# EAGLE board mother_v1 (EAGLE 5.06)
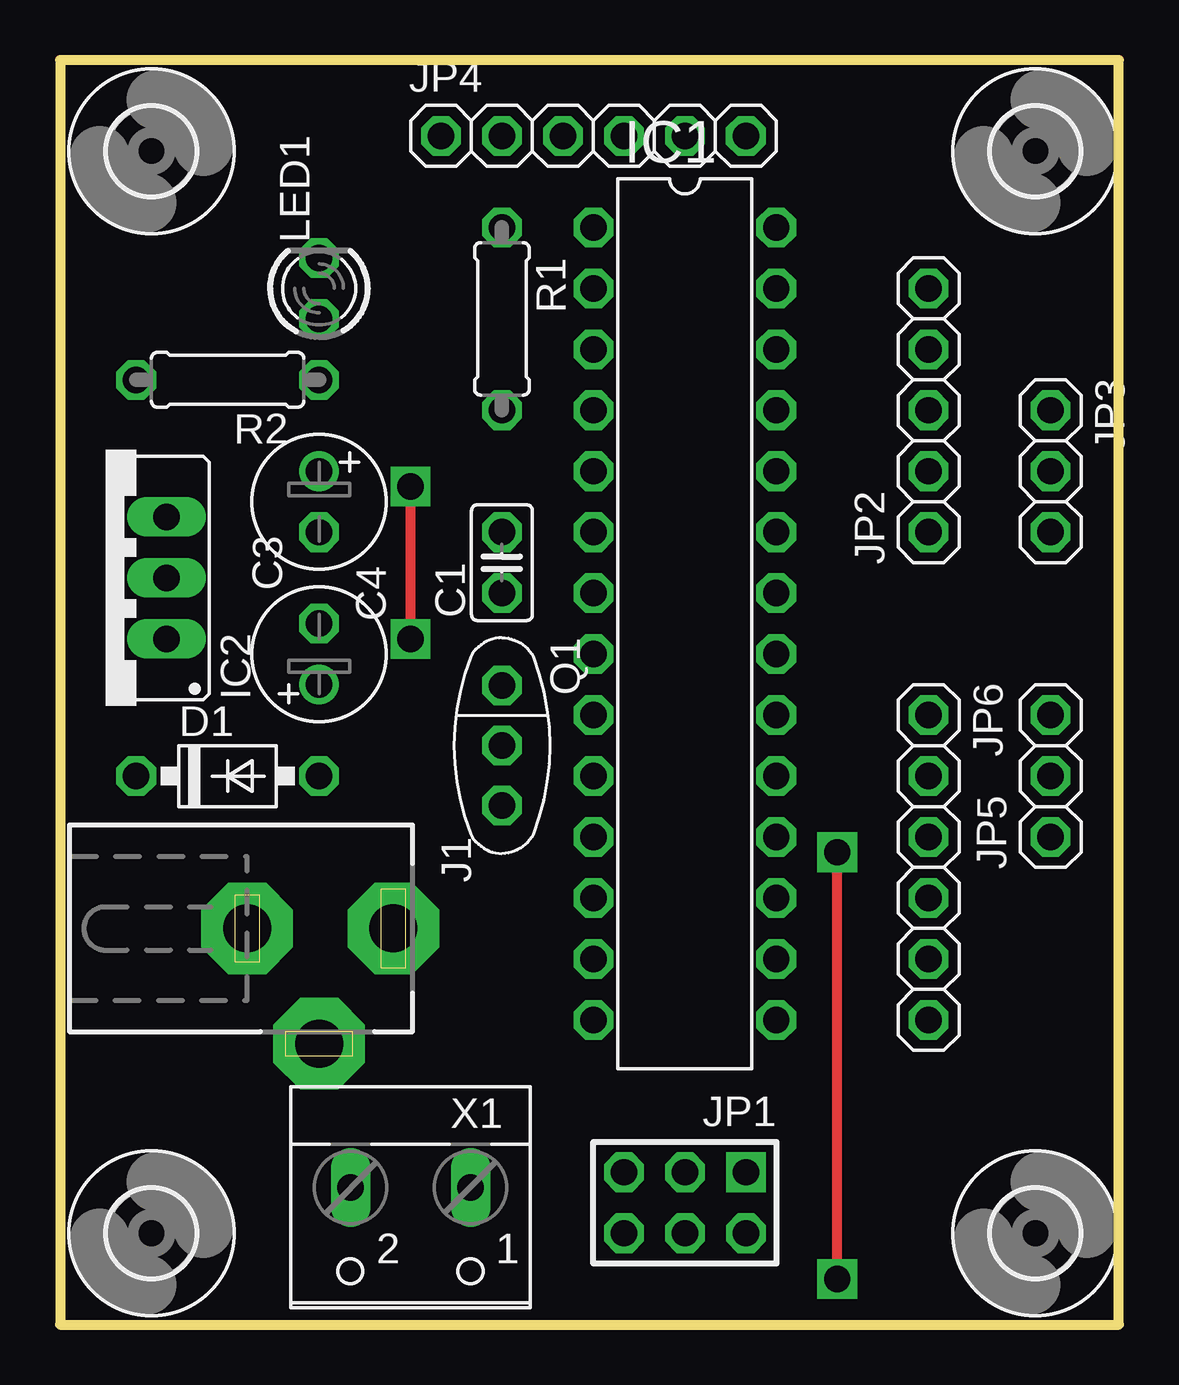
[diagram p0: board, top side]
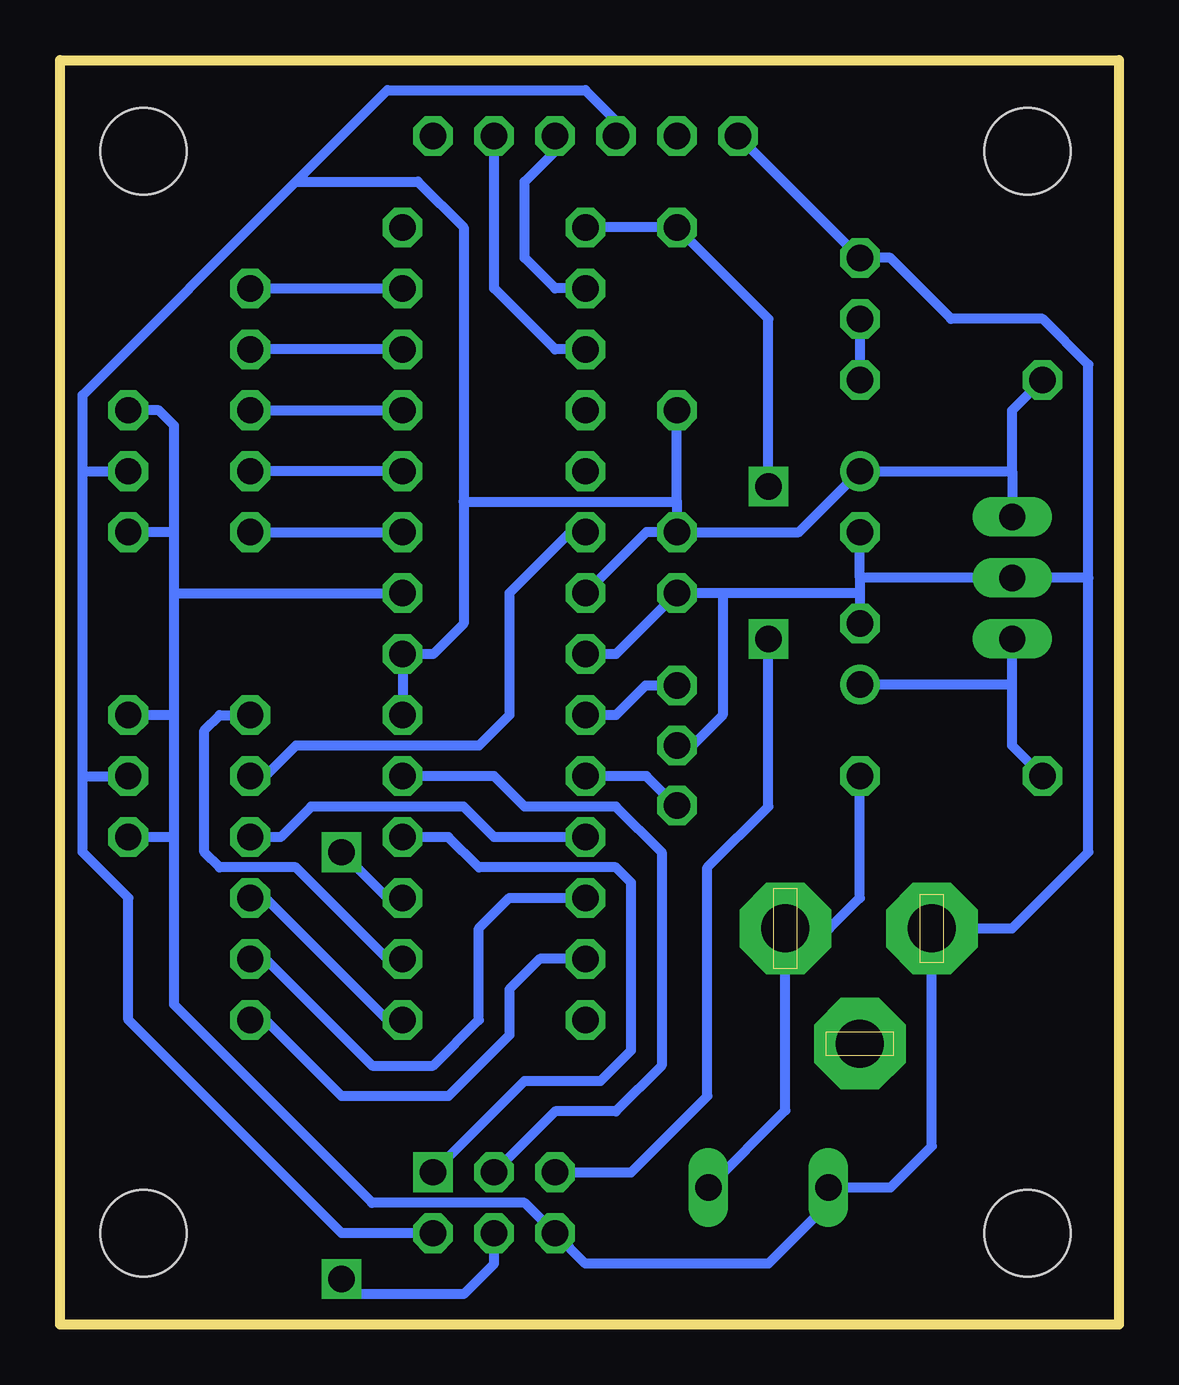
[diagram p1: board, bottom side, seen from below]

Size 44.12 x 52.7 mm. Coordinates in mm from the lower left corner, seen from the top.
Outline: 0,0 44.12,0 44.12,52.7 0,52.7 0,0
Copper layers (1*16): Top 0.035mm / dielectric 1.5mm / Bottom 0.035mm
Design rules "default": minimum track width 10mil, minimum drill 24mil, track to track 8mil, track to pad 8mil, pad to pad 8mil, via to via 8mil, smd to smd 8mil, copper to edge 40mil, drill to drill 8mil, minimum pad ring 10mil, minimum via ring 8mil, stop-mask expansion 4mil, vias tented up to drill 0mil, thermal gap 10mil

## Footprints (pad centres in the part's own frame; a part is rotated, then mirrored left to right if it is on the bottom)
C025-025X050 = drill 1.1 octagon: 1 -1.27,0; 2 1.27,0
E2,5-6 = drill 1.1 round: + -1.27,0 | drill 1.1 pad 1.6 octagon: - 1.27,0
DO41-10 = drill 1.1 octagon: A 3.81,0; C -3.81,0
DIL28-3 = drill 1.1 octagon: 1 -16.51,-3.81; 2 -13.97,-3.81; 3 -11.43,-3.81; 4 -8.89,-3.81; 5 -6.35,-3.81; 6 -3.81,-3.81; 7 -1.27,-3.81; 8 1.27,-3.81; 9 3.81,-3.81; 10 6.35,-3.81; 11 8.89,-3.81; 12 11.43,-3.81; 13 13.97,-3.81; 14 16.51,-3.81; 15 16.51,3.81; 16 13.97,3.81; 17 11.43,3.81; 18 8.89,3.81; 19 6.35,3.81; 20 3.81,3.81; 21 1.27,3.81; 22 -1.27,3.81; 23 -3.81,3.81; 24 -6.35,3.81; 25 -8.89,3.81; 26 -11.43,3.81; 27 -13.97,3.81; 28 -16.51,3.81
78XXS = drill 1.1 long: GND 0,-2.54; IN -2.54,-2.54; OUT 2.54,-2.54
DCJ0202A = drill 2 pad 3.81 octagon: 1 0,3.1; 2 4.8,0; 3 0,-3
AVR-ISP-6 = drill 1.1 square: 1 -2.54,-1.27 | drill 1.1 octagon: 2 -2.54,1.27; 3 0,-1.27; 4 0,1.27; 5 2.54,-1.27; 6 2.54,1.27
1X05 = drill 1.1 octagon: 1 -5.08,0; 2 -2.54,0; 3 0,0; 4 2.54,0; 5 5.08,0
1X03 = drill 1.1 octagon: 1 -2.54,0; 2 0,0; 3 2.54,0
1X06 = drill 1.1 octagon: 1 -6.35,0; 2 -3.81,0; 3 -1.27,0; 4 1.27,0; 5 3.81,0; 6 6.35,0
LED3MM = drill 1.1 octagon: A -1.27,0; K 1.27,0
CSTLS_G9 = drill 1.1 octagon: 1 -2.5,0; 2 0,0; 3 2.5,0
0207/7 = drill 1.1 octagon: 1 -3.81,0; 2 3.81,0
3,6 = hole 3.6: 0,0
W237-102 = drill 1.1 long: 1 -2.5,-1.27; 2 2.5,-1.27

## Placement (x,y rotation side)
C1  [C025-025X050]  18.41,31.75 90 top
C3  10uF/25V  [E2,5-6]  10.79,27.94 90 top
C4  100uF/16V  [E2,5-6]  10.79,34.29 270 top
D1  1N4001  [DO41-10]  6.99,22.86 0 top
IC1  MEGA8-P  [DIL28-3]  26.04,29.21 270 top
IC2  7805  [78XXS]  1.91,31.11 90 top
J1  [DCJ0202A]  10.79,16.51 270 top
JP1  AVR-ISP-6  [AVR-ISP-6]  26.04,5.08 180 top
JP2  [1X05]  36.2,38.1 90 top
JP3  [1X03]  41.27,35.56 270 top
JP4  [1X06]  22.22,49.53 0 top
JP5  [1X03]  41.27,22.86 90 top
JP6  [1X06]  36.2,19.05 270 top
LED1  [LED3MM]  10.79,43.18 90 top
Q1  [CSTLS_G9]  18.41,24.13 270 top
R1  10 K  [0207/7]  18.41,41.91 270 top
R2  1 K  [0207/7]  6.99,39.37 180 top
U$1  [3,6]  3.81,3.81 0 top
U$2  [3,6]  3.81,48.9 0 top
U$3  [3,6]  40.64,48.9 0 top
U$4  [3,6]  40.64,3.81 0 top
X1  [W237-102]  14.61,4.45 180 top

## Library data of the parts
C1 C3 C4 D1 IC1 IC2 J1 JP1-JP3 JP5 JP6 LED1 Q1 R1 R2 U$1-U$4 X1 = carrinho
JP4 = ccard

## Nets
#RST: IC1.1 JP1.5 R1.1
+5V: C1.2 C4.+ IC1.7 IC1.20 IC1.21 IC2.OUT JP1.2 JP3.2 JP4.3 JP5.2 R1.2 R2.2
EN_A: IC1.16 JP6.1
EN_B: IC1.15 JP6.4
GND: C1.1 C3.- C4.- IC1.8 IC1.22 IC2.GND J1.3 JP1.6 JP3.1 JP3.3 JP4.1 JP5.1 JP5.3 LED1.K Q1.2 X1.2
N$1: D1.A J1.1 X1.1
N$2: IC1.19 JP1.3
N$3: IC1.18 JP1.1
N$4: IC1.17 JP1.4
N$5: IC1.10 Q1.3
N$6: IC1.9 Q1.1
N$7: IC1.23 JP2.1
N$8: IC1.24 JP2.2
N$9: IC1.25 JP2.3
N$10: IC1.26 JP2.4
N$11: IC1.27 JP2.5
N$14: IC1.6 JP6.2
N$15: IC1.11 JP6.3
N$16: LED1.A R2.1
N$17: IC1.12 JP6.5
N$18: IC1.13 JP6.6
N$23: C3.+ D1.C IC2.IN
RXD: IC1.2 JP4.4
TXD: IC1.3 JP4.5

## Tracks (layer width: path | path; a pad name or v marks a point on that pad's centre or on a via)
#RST  (via drill 1.1)
  Top 0.406: v14.61,28.57 v14.61,34.92
  Bottom 0.406: v14.61,34.92 14.61,41.91 R1.1 IC1.1 | v14.61,28.57 14.61,21.59 17.14,19.05 17.14,9.53 20.32,6.35 JP1.5
+5V
  Bottom 0.406: 18.41,34.29 C1.2 | 18.41,34.29 R1.2 | 4.45,35.56 IC2.OUT | 4.45,35.56 4.45,38.1 R2.2 | 4.45,35.56 C4.+ 13.34,33.02 C1.2 | 27.3,34.29 18.41,34.29 | C1.2 19.68,33.02 IC1.7 | 27.3,34.29 27.3,29.21 28.57,27.94 IC1.21 IC1.20 | JP1.2 32.39,3.81 41.27,12.7 41.27,17.78 43.18,19.68 43.18,22.86 | 43.18,22.86 JP5.2 | 27.3,34.29 27.3,45.72 29.21,47.62 34.29,47.62 | 43.18,22.86 43.18,35.56 | 43.18,35.56 43.18,38.73 34.29,47.62 | 43.18,35.56 JP3.2 | JP4.3 20.95,50.16 22.22,51.44 30.48,51.44 34.29,47.62
EN_A
  Bottom 0.406: IC1.16 30.48,15.24 34.29,19.05 37.47,19.05 38.1,19.68 38.1,24.77 37.47,25.4 JP6.1
EN_B
  Bottom 0.406: IC1.15 30.48,12.7 35.56,17.78 JP6.4
GND
  Bottom 0.406: 10.79,31.11 IC2.GND 1.27,31.11 | 10.79,31.11 10.79,30.48 | 10.79,30.48 C3.- | 10.79,31.11 C4.- | 16.51,30.48 C1.1 20.95,27.94 IC1.8 | Q1.2 17.78,24.13 16.51,25.4 16.51,30.48 | 10.79,30.48 16.51,30.48 | JP4.1 LED1.K 9.53,44.45 6.99,41.91 3.17,41.91 1.27,40.01 1.27,31.11 | 1.27,31.11 1.27,19.68 4.45,16.51 J1.3 7.79,7.45 9.53,5.71 X1.2 12.11,5.04 14.61,2.54 22.22,2.54 JP1.6 24.76,5.08 31.11,5.08 39.37,13.34 39.37,20.32 | 39.37,20.32 JP5.1 | 39.37,20.32 39.37,25.4 | 39.37,25.4 39.37,30.48 | 39.37,30.48 39.37,33.02 | 39.37,33.02 39.37,37.47 40.01,38.1 JP3.1 | 39.37,33.02 JP3.3 | 39.37,25.4 JP5.3 | 39.37,30.48 IC1.22
N$1
  Bottom 0.406: D1.A 10.79,17.78 12.06,16.51 J1.1 13.89,8.93 X1.1
N$2
  Bottom 0.406: IC1.19 26.04,22.86 24.76,21.59 20.95,21.59 19.05,19.68 19.05,10.79 20.95,8.89 23.49,8.89 JP1.3
N$3
  Bottom 0.406: JP1.1 24.76,10.16 21.59,10.16 20.32,11.43 20.32,18.41 20.95,19.05 26.67,19.05 27.94,20.32 IC1.18
N$4  (via drill 1.1)
  Top 0.406: v32.39,1.91 v32.39,19.68
  Bottom 0.406: JP1.4 26.04,2.54 27.3,1.27 31.75,1.27 v32.39,1.91 | IC1.17 30.48,17.78 v32.39,19.68
N$5
  Bottom 0.406: Q1.3 18.45,21.63 19.68,22.86 IC1.10
N$6
  Bottom 0.406: Q1.1 19.72,26.63 20.95,25.4 IC1.9
N$7
  Bottom 0.406: JP2.1 IC1.23
N$8
  Bottom 0.406: IC1.24 JP2.2
N$9
  Bottom 0.406: JP2.3 IC1.25
N$10
  Bottom 0.406: IC1.26 JP2.4
N$11
  Bottom 0.406: JP2.5 IC1.27
N$14
  Bottom 0.406: IC1.6 22.86,33.02 25.4,30.48 25.4,25.4 26.67,24.13 34.29,24.13 35.56,22.86 JP6.2
N$15
  Bottom 0.406: IC1.11 26.04,20.32 27.3,21.59 33.66,21.59 34.93,20.32 JP6.3
N$16
  Bottom 0.406: LED1.A R2.1
N$17
  Bottom 0.406: JP6.5 35.56,15.24 31.11,10.79 28.57,10.79 26.67,12.7 26.67,16.51 25.4,17.78 IC1.12
N$18
  Bottom 0.406: IC1.13 24.13,15.24 25.4,13.97 25.4,12.06 27.94,9.53 32.39,9.53 35.56,12.7 JP6.6
N$23
  Bottom 0.406: 4.45,26.67 C3.+ | 4.45,26.67 IC2.IN | D1.C 4.45,24.13 4.45,26.67
RXD
  Bottom 0.406: IC1.2 23.49,43.18 24.76,44.45 24.76,47.62 23.49,48.9 JP4.4
TXD
  Bottom 0.406: IC1.3 23.49,40.64 26.04,43.18 JP4.5